# EAGLE board hat (EAGLE 7.4.0)
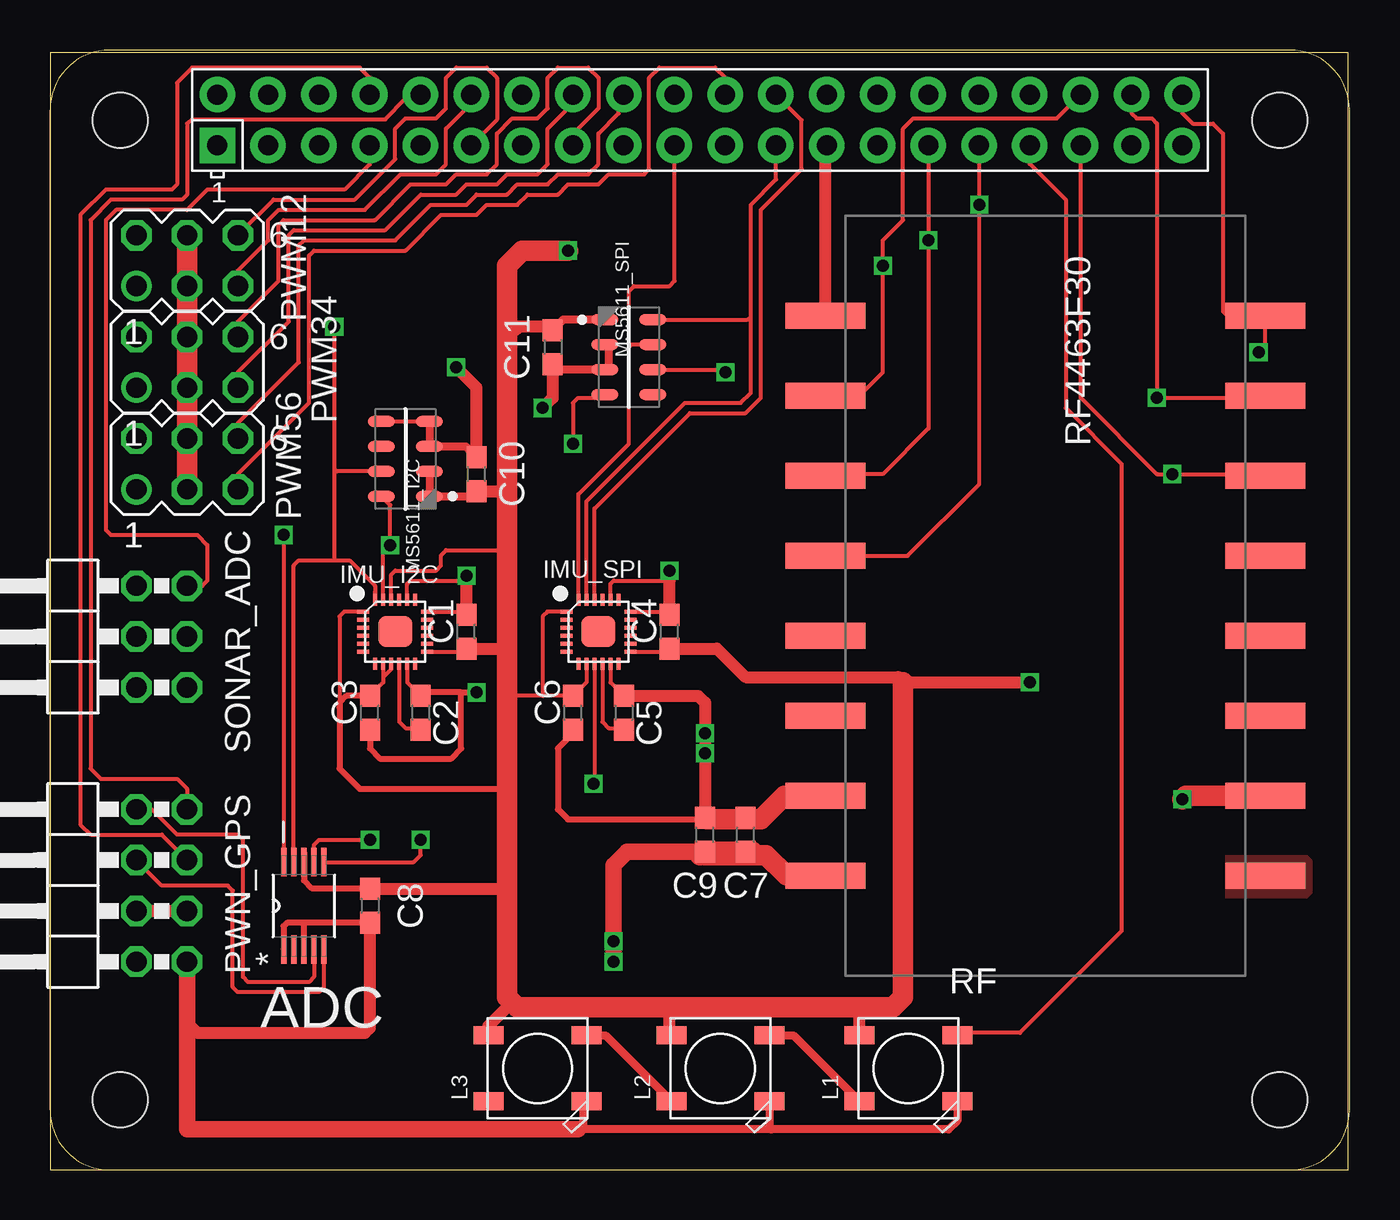
[diagram p0: board, top side]
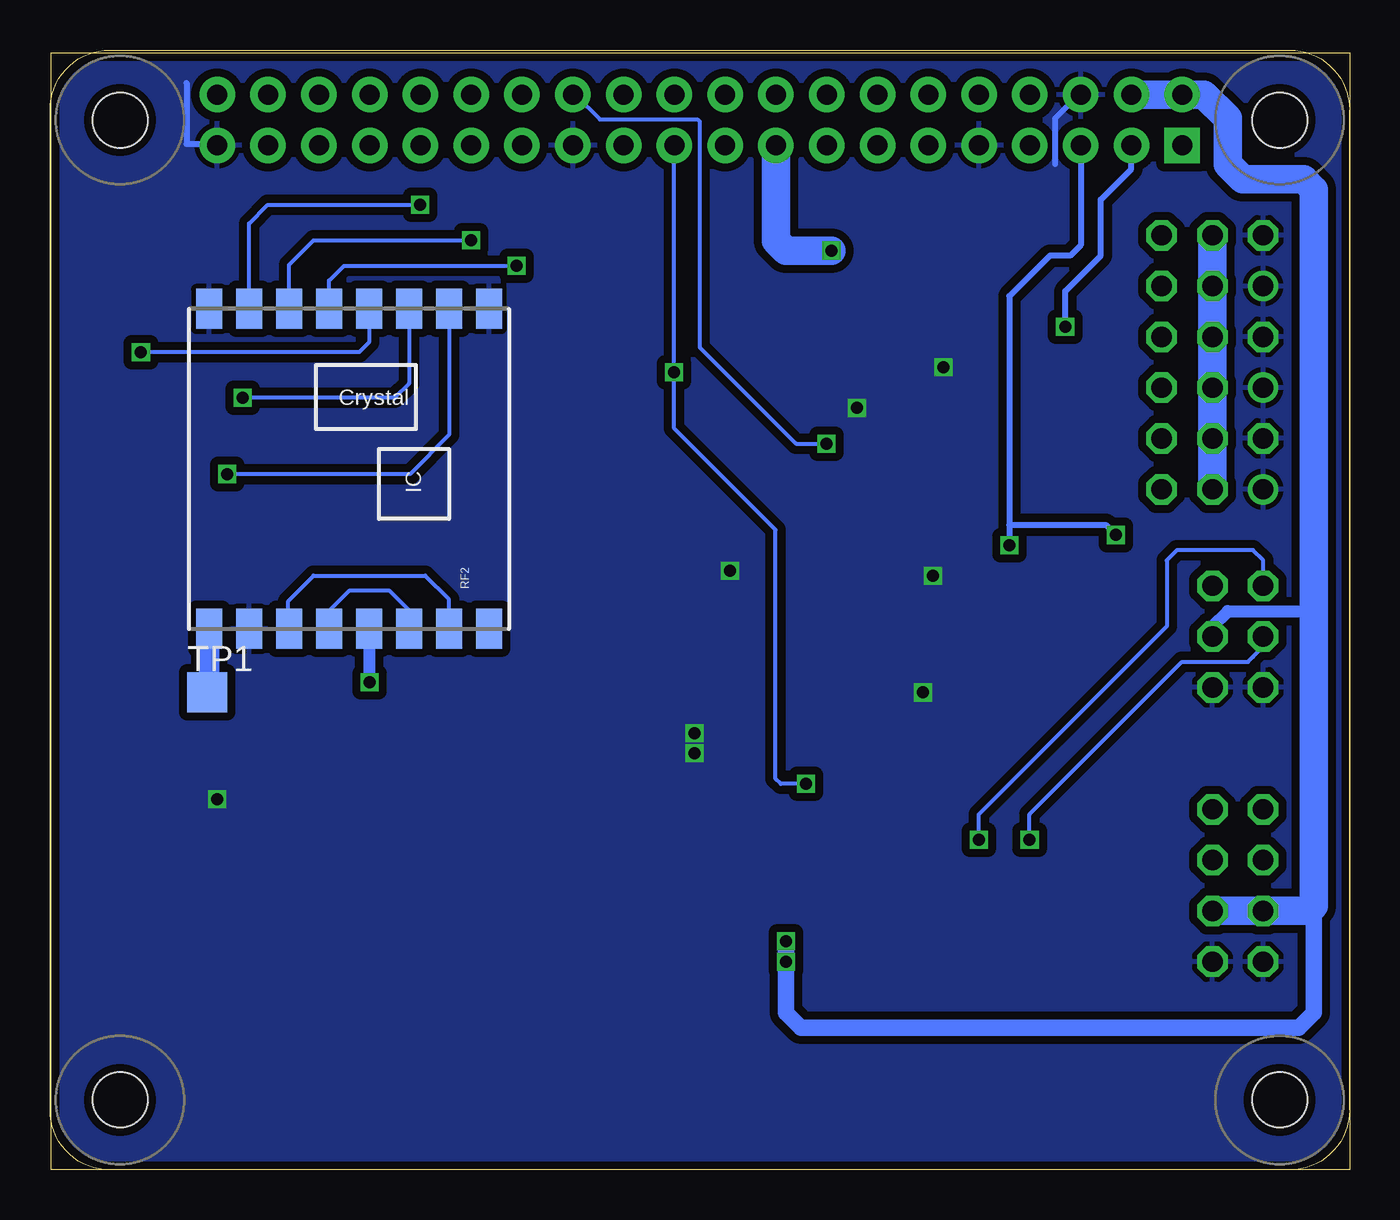
[diagram p1: board, bottom side, seen from below]

Size 64.95 x 55.87 mm. Coordinates in mm from the lower left corner, seen from the top.
Outline: 0,0 64.95,0 64.95,55.87 0,55.87 0,0
Copper layers (1*16): Top 0.035mm / dielectric 1.5mm / Bottom 0.035mm
Design rules "dirt_cheap_dirty_boards.v1": minimum track width 5mil, minimum drill 12mil, track to track 5mil, track to pad 5mil, pad to pad 5mil, via to via 5mil, smd to smd 0mil, copper to edge 10mil, drill to drill 10mil, minimum pad ring 10mil, minimum via ring 6mil, stop-mask expansion 2mil, vias tented up to drill 25mil, thermal gap 10mil

## Footprints (pad centres in the part's own frame; a part is rotated, then mirrored left to right if it is on the bottom)
SOP50P490X110-10N = smd 1.422 x 0.279: 1 -2.184,0.991; 2 -2.184,0.508; 3 -2.184,0; 4 -2.184,-0.508; 5 -2.184,-0.991; 6 2.184,-0.991; 7 2.184,-0.508; 8 2.184,0; 9 2.184,0.508; 10 2.184,0.991
C0603 = smd 1.1 x 1: 1 -0.85,0; 2 0.85,0
LEAD-QFN24 = smd 0.6 x 0.2: 1 -1.6,1; 2 -1.6,0.6; 3 -1.6,0.2; 4 -1.6,-0.2; 5 -1.6,-0.6; 6 -1.6,-1; 13 1.6,-1; 14 1.6,-0.6; 15 1.6,-0.2; 16 1.6,0.2; 17 1.6,0.6; 18 1.6,1 | smd 0.2 x 0.6: 7 -1,-1.6; 8 -0.6,-1.6; 9 -0.2,-1.6; 10 0.2,-1.6; 11 0.6,-1.6; 12 1,-1.6; 19 1,1.6; 20 0.6,1.6; 21 0.2,1.6; 22 -0.2,1.6; 23 -0.6,1.6; 24 -1,1.6 | smd 1.7 x 1.54: 25 0,0
WS2812B = smd 1.5 x 0.9: 1-VDD 2.45,-1.65; 2-DOUT 2.45,1.65; 3-GND -2.45,1.65; 4-DIN -2.45,-1.65
SON125P300X500X100-8N = smd 1.35 x 0.55: 1 -1.2,1.875; 2 -1.2,0.625; 3 -1.2,-0.625; 4 -1.2,-1.875; 5 1.2,-1.875; 6 1.2,-0.625; 7 1.2,0.625; 8 1.2,1.875
MA03-2 = drill 1.016: 1 -2.54,-1.27 | drill 1.016 octagon: 2 -2.54,1.27; 3 0,-1.27; 4 0,1.27; 5 2.54,-1.27; 6 2.54,1.27
2X04/90 = drill 1.016 octagon: 1 -3.81,-6.35; 2 -3.81,-3.81; 3 -1.27,-6.35; 4 -1.27,-3.81; 5 1.27,-6.35; 6 1.27,-3.81; 7 3.81,-6.35; 8 3.81,-3.81
RF4463F30 = smd 1.3 x 4: 1 14,-11; 2 10,-11; 3 6,-11; 4 2,-11; 5 -2,-11; 6 -6,-11; 7 -10,-11; 8 -14,-11; 9 -14,11; 10 -10,11; 11 -6,11; 12 -2,11; 13 2,11; 14 6,11; 15 10,11; 16 14,11
RFM22-XXX-S2 = smd 2 x 1.3: 1 -8,7; 2 -8,5; 3 -8,3; 4 -8,1; 5 -8,-1; 6 -8,-3; 7 -8,-5; 8 -8,-7; 9 8,-7; 10 8,-5; 11 8,-3; 12 8,-1; 13 8,1; 14 8,3; 15 8,5; 16 8,7
2X03/90 = drill 1.016 octagon: 1 -2.54,-6.35; 2 -2.54,-3.81; 3 0,-6.35; 4 0,-3.81; 5 2.54,-6.35; 6 2.54,-3.81
TP20SQ = smd 2 x 2: TP 0,0
RASPI_BOARD_B+HAT = drill 1 pad 1.778 square: 1 8.37,51.23 | drill 1 pad 1.778: 2 8.37,53.77; 3 10.91,51.23; 4 10.91,53.77; 5 13.45,51.23; 6 13.45,53.77; 7 15.99,51.23; 8 15.99,53.77; 9 18.53,51.23; 10 18.53,53.77; 11 21.07,51.23; 12 21.07,53.77; 13 23.61,51.23; 14 23.61,53.77; 15 26.15,51.23; 16 26.15,53.77; 17 28.69,51.23; 18 28.69,53.77; 19 31.23,51.23; 20 31.23,53.77; 21 33.77,51.23; 22 33.77,53.77; 23 36.31,51.23; 24 36.31,53.77; 25 38.85,51.23; 26 38.85,53.77; 27 41.39,51.23; 28 41.39,53.77; 29 43.93,51.23; 30 43.93,53.77; 31 46.47,51.23; 32 46.47,53.77; 33 49.01,51.23; 34 49.01,53.77; 35 51.55,51.23; 36 51.55,53.77; 37 54.09,51.23; 38 54.09,53.77; 39 56.63,51.23; 40 56.63,53.77 | hole 2.75: 3.5,3.5; 3.5,52.5; 61.5,3.5; 61.5,52.5

## Placement (x,y rotation side)
ADC  ADS1115IDGST  [SOP50P490X110-10N]  12.7,13.21 90 top
C1  100n  [C0603]  20.83,26.92 90 top
C2  100n  [C0603]  18.54,22.86 270 top
C3  10n  [C0603]  16,22.86 90 top
C4  100n  [C0603]  30.99,26.92 90 top
C5  100n  [C0603]  28.7,22.86 270 top
C6  10n  [C0603]  26.16,22.86 90 top
C7  100n  [C0603]  34.8,16.76 90 top
C8  100n  [C0603]  16,13.21 270 top
C9  47u  [C0603]  32.77,16.76 90 top
C10  [C0603]  21.34,34.8 90 top
C11  [C0603]  25.15,41.15 270 top
IMU_I2C  MPU-9250  [LEAD-QFN24]  17.27,26.92 0 top
IMU_SPI  MPU-9250  [LEAD-QFN24]  27.43,26.92 0 top
L1  WS2812B  [WS2812B]  42.93,5.08 180 top
L2  WS2812B  [WS2812B]  33.53,5.08 180 top
L3  WS2812B  [WS2812B]  24.38,5.08 180 top
MS5611_I2C  MS5611-01BA03  [SON125P300X500X100-8N]  17.78,35.56 180 top
MS5611_SPI  MS5611-01BA03  [SON125P300X500X100-8N]  28.96,40.64 0 top
PWM12  [MA03-2]  6.86,45.47 0 top
PWM34  [MA03-2]  6.86,40.39 0 top
PWM56  [MA03-2]  6.86,35.31 0 top
PWN_GPS  [2X04/90]  0.51,14.22 90 top
RF  RF4463F30  [RF4463F30]  49.78,28.7 270 top
RF2  RFM22SMD  [RFM22-XXX-S2]  50.04,35.05 90 bottom
SONAR_ADC  [2X03/90]  0.51,26.67 90 top
TP1  TPTP20SQ  [TP20SQ]  57.15,23.88 0 bottom
X1  RASPI_BOARD_B+_H  [RASPI_BOARD_B+HAT]  0,0 0 top

## Library data of the parts
ADC = Texas Instruments_By_element14_Batch_1; MPN: ADS1115IDGST; OC_FARNELL: 1762981; OC_NEWARK: 25R1241; PACKAGE: MSOP-10; SUPPLIER: Texas Instruments
C1-C11 = resistor
IMU_I2C IMU_SPI = invensense
L1-L3 = adafruit
MS5611_I2C MS5611_SPI = Measurement-Specialties
PWM12 PWM34 PWM56 = con-lstb; OC_FARNELL: unknown; OC_NEWARK: unknown
PWN_GPS SONAR_ADC = pinhead+
RF = nicerf
RF2 = SparkFun
TP1 = testpad
X1 = raspberrypi_bastelstube_v13

## Nets
3V3: ADC.8 C1.1 C3.2 C4.1 C6.2 C8.1 C10.1 C11.1 IMU_I2C.1 IMU_I2C.8 IMU_I2C.9 IMU_I2C.13 IMU_I2C.22 IMU_SPI.1 IMU_SPI.8 IMU_SPI.13 L1.1-VDD L2.1-VDD L3.1-VDD MS5611_I2C.1 MS5611_I2C.2 MS5611_SPI.1 RF2.5 X1.17
5V: C7.1 C9.1 PWN_GPS.3 PWN_GPS.4 RF.1 SONAR_ADC.3 X1.2 X1.4
ANT: RF.16
CE11: IMU_SPI.22 X1.24
CE12: MS5611_SPI.4 X1.26
CE21: RF2.13 RF.7 X1.36
GND: ADC.1 ADC.3 C1.2 C2.1 C3.1 C4.2 C5.1 C6.1 C7.2 C8.2 C9.2 C10.2 C11.2 IMU_I2C.11 IMU_I2C.18 IMU_I2C.20 IMU_SPI.11 IMU_SPI.18 IMU_SPI.20 L1.3-GND L2.3-GND L3.3-GND MS5611_I2C.3 MS5611_I2C.4 MS5611_I2C.5 MS5611_SPI.2 MS5611_SPI.3 PWM12.1 PWM12.2 PWM34.1 PWM34.2 PWM56.1 PWM56.2 PWN_GPS.1 PWN_GPS.2 RF2.2 RF2.9 RF2.16 RF.2 RF.8 RF.15 SONAR_ADC.1 SONAR_ADC.2 X1.6 X1.9 X1.25 X1.39
MISO1: IMU_SPI.9 MS5611_SPI.6 X1.21
MISO2: RF2.10 RF.11 X1.35
MOSI1: IMU_SPI.24 MS5611_SPI.7 X1.19
MOSI2: RF2.11 RF.10 X1.38
N$1: C2.2 IMU_I2C.10
N$2: C5.2 IMU_SPI.10
N$3: L1.2-DOUT L2.4-DIN
N$4: L2.2-DOUT L3.4-DIN
N$5: SONAR_ADC.5 X1.7
N$6: ADC.6 SONAR_ADC.6
N$7: ADC.7 SONAR_ADC.4
N$8: PWM12.6 X1.11
N$9: PWM12.5 X1.12
N$10: L1.4-DIN X1.33
N$11: RF2.15 RF.5 X1.31
N$12: ADC.5 PWN_GPS.6
N$13: PWM34.6 X1.15
N$14: PWM34.5 X1.16
N$15: PWM56.6 X1.18
N$16: PWM56.5 X1.22
N$17: RF2.14 RF.6 X1.29
N$18: RF2.1 TP1.TP
N$19: RF2.4 RF2.6
N$20: RF2.3 RF2.7
N$21: ADC.4 PWN_GPS.8
N$23: PWN_GPS.5 X1.8
N$24: PWN_GPS.7 X1.10
N$28: PWM12.3 PWM12.4 PWM34.3 PWM34.4 PWM56.3 PWM56.4
NC: X1.1
SCL1: ADC.10 IMU_I2C.23 MS5611_I2C.8 X1.5
SCLK1: IMU_SPI.23 MS5611_SPI.8 X1.23
SCLK2: RF2.12 RF.9 X1.40
SDA1: ADC.9 IMU_I2C.24 MS5611_I2C.7 X1.3

## Tracks (layer width: path | path; a pad name or v marks a point on that pad's centre or on a via)
3V3  (via drill 0.6)
  Top 0.203: IMU_I2C.13 20.68,25.92 C1.1 | IMU_I2C.8 16.67,24.64 | 16.67,24.64 16.67,24.38 C3.2 | IMU_I2C.22 17.07,29.77 17.27,29.97 19.3,29.97 19.56,30.23 19.56,30.73 19.81,30.99 22.86,30.99 | IMU_SPI.8 26.83,24.38 C6.2 24.64,23.71 | IMU_SPI.13 30.84,25.92 C4.1 | 24.64,23.71 23.2,23.71 22.86,23.62 | IMU_I2C.1 14.72,27.92 14.48,27.69 14.48,23.11 | IMU_SPI.1 24.88,27.92 24.64,27.69 24.64,23.71 | IMU_I2C.9 17.07,25.04 16.67,24.64
  Top 0.305: C3.2 14.82,23.71 14.48,23.37 14.48,23.11 14.48,20.07 15.49,19.05 22.73,19.05 22.86,18.92 | 15.96,14.1 13.08,14.1 12.7,14.48 ADC.8 12.7,15.88 | 15.96,14.1 C8.1 | 15.96,14.1 22.73,14.1 22.86,13.97
  Top 0.406: L2.1-VDD 31.08,6.69 30.99,6.6 | L3.1-VDD 21.93,6.69 21.84,6.6 | MS5611_SPI.1 25.66,42.51 C11.1 | C10.1 21.07,33.69 MS5611_I2C.1 MS5611_I2C.2
  Top 0.61: 22.95,33.95 22.86,33.78 | C1.1 23.03,26.07 22.86,26.16 | C8.1 22.69,14.06 | C4.1 33.36,26.07 34.8,24.64 42.42,24.64 42.67,24.38 v49.02,24.38 | 22.86,42.16 23.28,42 23.45,42.16 24.89,42.16 25.06,42 C11.1 | C10.1 22.77,33.95 22.86,34.04 | L3.1-VDD 21.93,7.2 23.11,8.38 | 30.99,6.6 30.99,7.87 31.24,8.13 | L1.1-VDD 40.48,8.04 40.39,8.13
  Top 1.016: v25.91,45.97 23.62,45.97 22.86,45.21 22.86,42.16 22.86,34.04 22.86,33.78 22.86,30.99 22.86,26.16 22.86,23.62 22.86,18.92 22.86,13.97 22.86,8.64 23.11,8.38 23.37,8.13 31.24,8.13 40.39,8.13 42.16,8.13 42.67,8.64 42.67,24.38
  Bottom 0.61: RF2.5 49.04,24.4 v49.02,24.38
  Bottom 1.422: X1.17 28.69,46.47 28.19,45.97 v25.91,45.97
5V  (via drill 0.6)
  Top 0.61: PWN_GPS.4 PWN_GPS.3
  Top 0.813: C9.1 28.87,15.91 28.19,15.24 v28.19,10.41
  Top 1.016: C9.1 32.77,15.75 35.31,15.75 | 35.31,15.75 35.81,15.75 36.83,14.73 38.75,14.73 RF.1 | 35.31,15.75 35.14,15.91 C7.1 32.68,15.91 32.51,15.75
  Bottom 0.61: SONAR_ADC.3 6.86,27.18 6.1,27.94 1.78,27.94
  Bottom 0.813: 1.78,13.21 1.78,7.87 2.54,7.11 27.43,7.11 28.19,7.87 v28.19,10.41 v28.19,11.43
  Bottom 1.422: X1.4 X1.2 7.29,53.77 6.1,52.58 6.1,50.29 5.33,49.53 2.29,49.53 1.78,49.02 1.78,27.94 1.78,13.21 2.03,12.95 PWN_GPS.3
ANT
  pour Top (no thermals): 58.8,15.75 62.86,15.75 63.12,15.49 63.12,13.84 62.86,13.59 58.8,13.59
CE11
  Top 0.203: IMU_SPI.22 27.23,33.07 32,37.85 34.8,37.85 35.56,38.61 35.56,48.01 37.59,50.04 37.59,52.49 X1.24
CE12  (via drill 0.6)
  Top 0.203: v26.16,36.32 26.16,38.35 26.42,38.61 27.6,38.61 MS5611_SPI.4
  Bottom 0.203: X1.26 38.73,53.77 37.49,52.53 32.61,52.53 32.51,52.43 32.51,41.15 27.69,36.32 v26.16,36.32
CE21  (via drill 0.6)
  Top 0.203: X1.36 50.36,52.58 43.18,52.58 42.67,52.07 42.67,47.5 41.66,46.48 v41.66,45.21 41.66,39.88 40.48,38.7 RF.7
  Bottom 0.203: RF2.13 51.04,44.47 50.29,45.21 v41.66,45.21
GND  (via drill 0.6)
  Top 0.203: IMU_I2C.18 20.68,27.92 C1.2 | IMU_I2C.11 17.87,24.38 C2.1 | IMU_I2C.20 17.87,29.3 18.03,29.46 20.57,29.46 v20.83,29.72 | 11.68,11.05 ADC.1 | IMU_SPI.11 28.03,24.38 C5.1 | IMU_SPI.18 30.84,27.92 C4.2 | IMU_SPI.20 28.03,29.3 28.19,29.46 30.99,29.46 | MS5611_I2C.5 MS5611_I2C.4
  Top 0.305: C8.2 12.7,12.36 | 12.7,12.36 11.85,12.36 11.68,12.19 11.68,11.05 | ADC.3 12.7,12.36 | C3.1 16,21.08 16.51,20.57 20.07,20.57 20.57,21.08 20.57,23.88 | 20.57,23.88 18.71,23.88 C2.1 | 20.57,23.88 v21.34,23.88 | C6.1 26.16,21.84 25.4,21.08 25.4,18.03 25.91,17.53 32.68,17.53 C9.2
  Top 0.406: L1.3-GND 45.38,2.45 44.96,2.03 36.07,2.03 | 36.07,2.03 26.67,2.03 | 26.67,2.03 26.42,2.03 26.67,2.29 | L2.3-GND 35.98,2.12 36.07,2.03 | L3.3-GND 26.8,3.43 26.67,3.3 26.67,2.29 | 26.67,2.29 26.67,2.03 | C10.2 20.8,36.19 MS5611_I2C.3 MS5611_I2C.4 | C11.2 25.43,40.02 MS5611_SPI.3 27.94,40.2 27.94,41.15 27.82,41.27 MS5611_SPI.2
  Top 0.61: C1.2 v20.83,29.72 | PWN_GPS.1 6.86,7.37 7.37,6.86 15.75,6.86 16,7.11 C8.2 | C7.2 35.65,17.61 35.81,17.78 | C5.1 32.42,23.71 32.77,23.37 v32.77,21.84 v32.77,20.83 C9.2 | RF.8 38.78,51.16 X1.25 | C11.2 25.15,38.61 v24.64,38.1 | C10.2 21.34,39.12 v20.32,40.13 | C4.2 30.99,29.46 v30.99,29.97
  Top 0.813: 26.42,2.03 6.86,2.03 PWN_GPS.1
  Top 1.016: RF.2 36.74,18.7 35.81,17.78 35.56,17.53 32.85,17.53 C9.2 | RF.15 56.8,18.7 v56.64,18.54
  Bottom 0.305: 58.17,54.36 58.17,51.31 56.71,51.31 X1.39 | X1.6 13.54,53.77 14.73,52.58 14.73,50.29
  pour Bottom (isolate 0.406): -0.25,0 -0.25,56.13 64.77,56.13 64.77,0
MISO1  (via drill 0.6)
  Top 0.203: IMU_SPI.9 27.23,19.36 v27.18,19.3 | 33.75,39.85 v33.78,39.88 33.65,40.02 MS5611_SPI.6
  Bottom 0.203: v27.18,19.3 28.45,19.3 28.7,19.56 28.7,32 33.78,37.08 v33.78,39.88 33.78,51.22 X1.21
MISO2  (via drill 0.6)
  Top 0.203: X1.35 51.56,51.22 51.56,38.61 55.37,34.8 v56.13,34.8 60.69,34.8 RF.11
  Bottom 0.203: RF2.10 45.04,36.75 46.99,34.8 v56.13,34.8
MOSI1
  Top 0.203: IMU_SPI.24 26.43,33.8 28.96,36.32 28.96,41.15 | 28.96,41.15 28.96,43.94 29.21,44.2 30.99,44.2 31.24,44.45 31.24,51.22 X1.19 | 30.04,41.15 MS5611_SPI.7 29.07,41.27 28.96,41.15
MOSI2  (via drill 0.6)
  Top 0.203: X1.38 54.09,52.84 54.36,52.58 55.12,52.58 55.37,52.32 v55.37,38.61 60.69,38.61 RF.10
  Bottom 0.203: RF2.11 47.04,39.32 47.75,38.61 v55.37,38.61
N$1
  Top 0.203: IMU_I2C.10 17.47,22.41 17.78,22.1 18.45,22.1 C2.2
N$2
  Top 0.203: IMU_SPI.10 27.63,22.41 27.94,22.1 28.61,22.1 C5.2
N$3
  Top 0.406: L2.4-DIN 37.18,6.73 L1.2-DOUT
N$4
  Top 0.406: L3.4-DIN 27.78,6.73 L2.2-DOUT
N$5
  Top 0.203: X1.7 15.99,50.28 14.73,49.02 7.87,49.02 6.86,48.01 3.3,48.01 2.79,47.5 2.79,32 3.05,31.75 7.37,31.75 7.87,31.24 7.87,29.46 7.62,29.21 SONAR_ADC.5
N$6  (via drill 0.6)
  Top 0.203: ADC.6 18.19,15.39 18.54,15.75 v18.54,16.51
  Bottom 0.203: SONAR_ADC.6 4.32,30.48 4.83,30.99 8.64,30.99 9.14,30.48 9.14,27.18 18.54,17.78 v18.54,16.51
N$7  (via drill 0.6)
  Top 0.203: ADC.7 13.21,16.26 13.46,16.51 v16,16.51
  Bottom 0.203: SONAR_ADC.4 4.32,26.16 4.83,25.65 5.08,25.4 8.38,25.4 16,17.78 v16,16.51
N$8
  Top 0.203: PWM12.6 11.18,48.51 15.24,48.51 17.27,50.55 17.27,52.07 17.78,52.58 19.3,52.58 19.81,53.09 19.81,54.61 20.32,55.12 21.84,55.12 22.35,54.61 22.35,52.51 X1.11
N$9
  Top 0.203: PWM12.5 9.4,44.96 10.92,46.48 10.92,47.5 11.43,48.01 15.75,48.01 17.53,49.78 19.3,49.78 19.81,50.29 19.81,52.07 21.08,53.34 21.08,53.76 X1.12
N$10
  Top 0.203: L1.4-DIN 45.5,6.86 48.51,6.86 53.59,11.94 53.59,35.31 50.8,38.1 50.8,48.51 49.01,50.3 X1.33
N$11  (via drill 0.6)
  Top 0.203: RF.5 42.89,30.7 46.48,34.29 v46.48,48.26 46.48,51.22 X1.31
  Bottom 0.203: RF2.15 55.04,47.32 54.1,48.26 v46.48,48.26
N$12
  Top 0.203: ADC.5 13.69,9.12 13.46,8.89 9.4,8.89 9.14,9.14 9.14,13.97 8.89,14.22 5.59,14.22 PWN_GPS.6
N$13
  Top 0.203: PWM34.6 9.4,42.42 11.43,44.45 11.43,47.24 11.68,47.5 16.26,47.5 18.03,49.28 19.81,49.28 20.32,49.78 21.84,49.78 22.35,50.29 22.35,51.82 23.11,52.58 24.38,52.58 24.89,53.09 24.89,54.61 25.4,55.12 26.92,55.12 27.43,54.61 27.43,53.09 26.16,51.82 26.16,51.24 X1.15
N$14
  Top 0.203: PWM34.5 9.4,39.88 11.94,42.42 11.94,46.74 12.19,46.99 16.76,46.99 18.54,48.77 20.32,48.77 20.83,49.28 22.35,49.28 22.86,49.78 24.38,49.78 24.89,50.29 24.89,52.07 26.16,53.34 26.16,53.76 X1.16
N$15
  Top 0.203: PWM56.6 9.4,37.34 12.45,40.39 12.45,46.23 12.7,46.48 17.27,46.48 19.05,48.26 20.83,48.26 21.34,48.77 22.86,48.77 23.37,49.28 24.89,49.28 25.4,49.78 26.92,49.78 27.43,50.29 27.43,51.82 28.45,52.83 28.45,53.53 X1.18
N$16
  Top 0.203: PWM56.5 9.4,34.8 12.95,38.35 12.95,45.72 13.21,45.97 17.78,45.97 19.56,47.75 21.34,47.75 21.84,48.26 23.37,48.26 23.88,48.77 25.4,48.77 25.91,49.28 27.43,49.28 27.94,49.78 29.72,49.78 29.97,50.04 29.97,54.61 30.48,55.12 33.27,55.12 33.78,54.61 33.78,53.78 X1.22
N$17  (via drill 0.6)
  Top 0.203: X1.29 43.94,51.22 v43.94,46.48 43.94,37.08 41.66,34.8 38.88,34.8 RF.6
  Bottom 0.203: RF2.14 53.04,45.26 51.82,46.48 v43.94,46.48
N$18
  Bottom 1.016: RF2.1 57.04,23.99 TP1.TP
N$19
  Bottom 0.203: RF2.6 47.04,27.99 48.01,28.96 50.04,28.96 51.05,27.94 51.05,27.07 RF2.4
N$20
  Bottom 0.203: RF2.7 45.04,28.53 46.23,29.72 51.82,29.72 53.09,28.45 53.09,27.1 RF2.3
N$21
  Top 0.203: ADC.4 13.21,9.65 12.95,9.4 9.91,9.4 9.65,9.65 9.65,16.51 9.4,16.76 6.35,16.76 5.08,18.03 PWN_GPS.8
N$23
  Top 0.203: X1.8 15.99,54.62 15.49,55.12 7.11,55.12 6.35,54.36 6.35,49.28 6.1,49.02 2.79,49.02 1.52,47.75 1.52,17.27 2.03,16.76 5.59,16.76 PWN_GPS.5
N$24
  Top 0.203: PWN_GPS.7 6.86,19.05 6.35,19.56 2.54,19.56 2.03,20.07 2.03,47.5 3.05,48.51 6.6,48.51 6.86,48.77 6.86,52.32 7.11,52.53 16.76,52.53 17.78,53.59 18.35,53.59 X1.10
N$28
  Top 1.016: PWM56.3 PWM56.4 PWM34.3 PWM34.4 PWM12.3 PWM12.4
  Bottom 1.422: PWM12.4 PWM56.3
SCL1  (via drill 0.6)
  Top 0.203: IMU_I2C.23 16.67,30.9 v17.02,31.24 17.02,33.25 MS5611_I2C.8 | ADC.10 11.71,31.73 v11.68,31.75
  Bottom 0.305: X1.5 13.45,46.24 13.97,45.72 14.99,45.72 17.02,43.69 17.02,32.26 | 17.02,32.26 v17.02,31.24 | 17.02,32.26 12.19,32.26 v11.68,31.75
SCLK1
  Top 0.203: IMU_SPI.23 26.83,33.44 31.75,38.35 34.54,38.35 35.05,38.86 35.05,42.67 | X1.23 36.32,51.22 36.32,49.53 35.05,48.26 35.05,42.67 | MS5611_SPI.8 34.9,42.51 35.05,42.67
SCLK2  (via drill 0.6)
  Top 0.203: X1.40 56.63,52.84 57.15,52.32 58.17,52.32 58.67,51.82 58.67,42.93 58.93,42.67 60.75,42.67 | 60.75,42.67 RF.9 | 60.75,42.67 60.75,41.2 v60.45,40.89
  Bottom 0.203: RF2.12 49.04,41.39 49.53,40.89 v60.45,40.89
SDA1  (via drill 0.6)
  Top 0.203: 16.27,28.94 IMU_I2C.24 16.26,28.54 16.26,29.21 14.99,30.48 14.22,30.48 | v14.22,42.16 14.22,35.05 | 14.22,35.05 14.22,30.48 | ADC.9 12.19,30.23 12.45,30.48 14.22,30.48 | MS5611_I2C.7 14.34,34.94 14.22,35.05
  Bottom 0.203: X1.3 10.91,50.05 10.92,50.04
  Bottom 0.305: v14.22,42.16 14.22,43.94 12.45,45.72 12.45,48.51 10.92,50.04 10.92,51.31